# EAGLE board sevseg_driver (EAGLE 7.2.0)
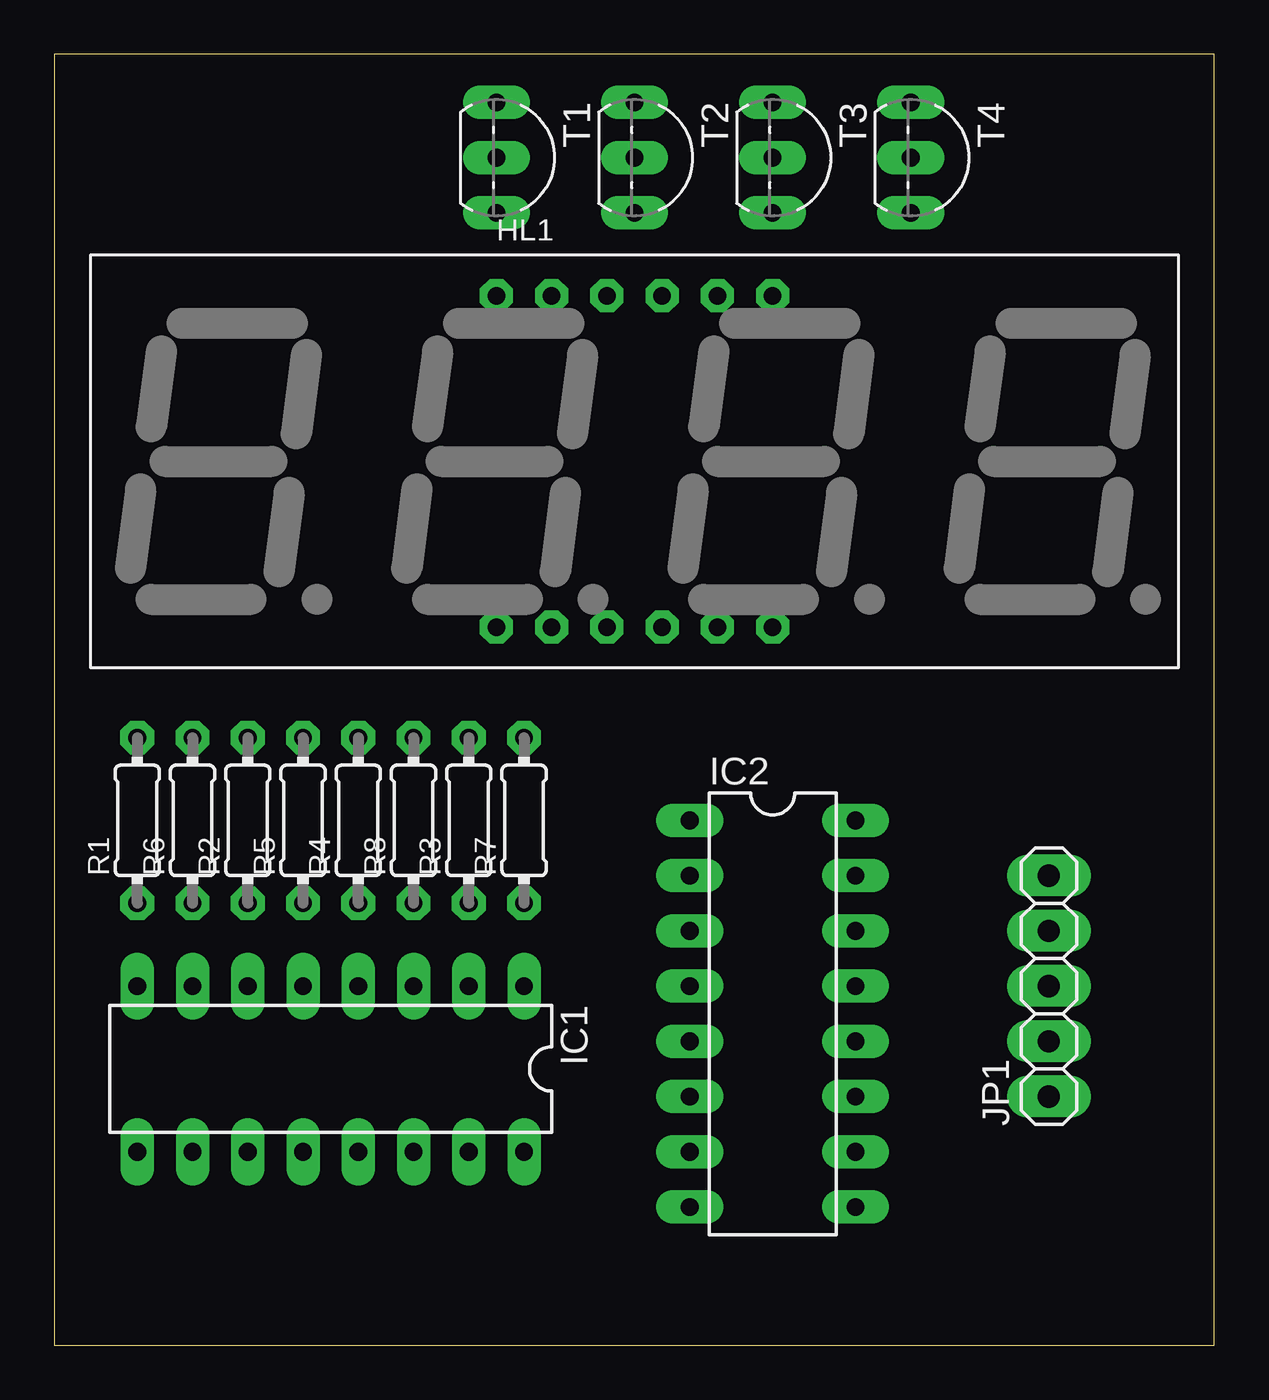
[diagram p0: board, top side]
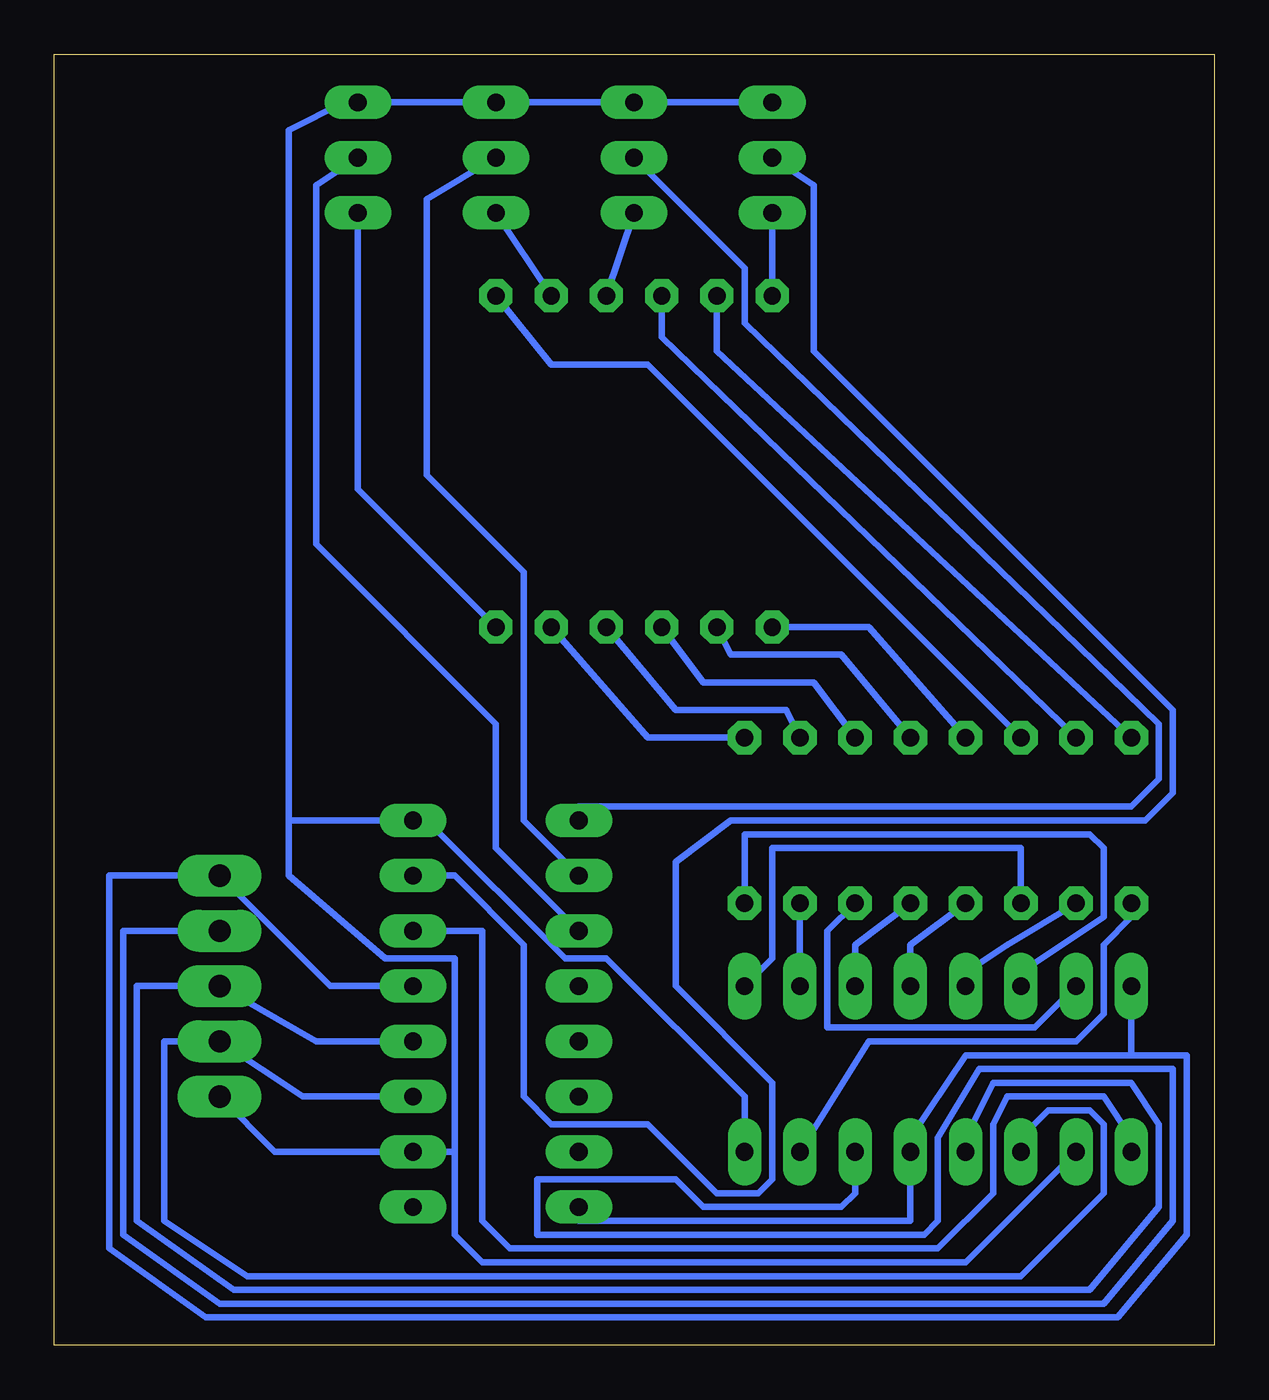
[diagram p1: board, bottom side, seen from below]

Size 53.32 x 59.36 mm. Coordinates in mm from the lower left corner, seen from the top.
Outline: 0,0 53.32,0 53.32,59.36 0,59.36 0,0
Copper layers (1*16): Top 0.035mm / dielectric 1.5mm / Bottom 0.035mm
Design rules "default *": minimum track width 10mil, minimum drill 24mil, track to track 8mil, track to pad 8mil, pad to pad 8mil, via to via 8mil, smd to smd 8mil, copper to edge 40mil, drill to drill 8mil, minimum pad ring 10mil, minimum via ring 8mil, stop-mask expansion 4mil, vias tented up to drill 0mil, thermal gap 10mil

## Footprints (pad centres in the part's own frame; a part is rotated, then mirrored left to right if it is on the bottom)
C/A-564 = drill 0.8 octagon: 1 -6.35,-7.62; 2 -3.81,-7.62; 3 -1.27,-7.62; 4 1.27,-7.62; 5 3.81,-7.62; 6 6.35,-7.62; 7 6.35,7.62; 8 3.81,7.62; 9 1.27,7.62; 10 -1.27,7.62; 11 -3.81,7.62; 12 -6.35,7.62
DIL16 = drill 0.813 long: 1 -8.89,-3.81; 2 -6.35,-3.81; 3 -3.81,-3.81; 4 -1.27,-3.81; 5 1.27,-3.81; 6 3.81,-3.81; 7 6.35,-3.81; 8 8.89,-3.81; 9 8.89,3.81; 10 6.35,3.81; 11 3.81,3.81; 12 1.27,3.81; 13 -1.27,3.81; 14 -3.81,3.81; 15 -6.35,3.81; 16 -8.89,3.81
1X05 = drill 1.016 long: 1 -5.08,0; 2 -2.54,0; 3 0,0; 4 2.54,0; 5 5.08,0
0204/7 = drill 0.813 octagon: 1 -3.81,0; 2 3.81,0
TO92-EBC = drill 0.813 long: B 0,-1.27; C -2.54,-1.27; E 2.54,-1.27

## Placement (x,y rotation side)
HL1  A-564E  [C/A-564]  26.67,40.64 0 top
IC1  74HC595N  [DIL16]  12.7,12.7 180 top
IC2  74HC595N  [DIL16]  33.02,15.24 270 top
JP1  MCU  [1X05]  45.72,16.51 90 top
R1  220  [0204/7]  3.81,24.13 90 top
R2  220  [0204/7]  8.89,24.13 90 top
R3  220  [0204/7]  19.05,24.13 90 top
R4  220  [0204/7]  13.97,24.13 90 top
R5  220  [0204/7]  11.43,24.13 90 top
R6  220  [0204/7]  6.35,24.13 90 top
R7  220  [0204/7]  21.59,24.13 90 top
R8  220  [0204/7]  16.51,24.13 90 top
T1  BC338  [TO92-EBC]  21.59,54.61 270 top
T2  BC338  [TO92-EBC]  27.94,54.61 270 top
T3  BC338  [TO92-EBC]  34.29,54.61 270 top
T4  BC338  [TO92-EBC]  40.64,54.61 270 top

## Library data of the parts
HL1 = led-seg
IC1 IC2 = 74xx-eu
JP1 = pinhead
R1-R8 = resistor
T1-T4 = transistor-npn

## Nets
GND: IC1.8 IC1.13 IC2.8 IC2.13 JP1.5
N$1: IC1.15 R1.1
N$2: HL1.3 R8.2
N$3: HL1.11 R1.2
N$4: IC1.1 R2.1
N$5: HL1.7 R2.2
N$6: HL1.4 R3.2
N$7: IC1.2 R3.1
N$8: IC1.3 R4.1
N$9: IC1.9 IC2.14
N$10: HL1.12 T1.E
N$11: HL1.9 T2.E
N$12: HL1.8 T3.E
N$13: HL1.6 T4.E
N$14: IC1.14 JP1.4
N$15: HL1.2 R4.2
N$16: HL1.1 R5.2
N$17: IC1.4 R5.1
N$18: IC1.5 R6.1
N$19: HL1.10 R6.2
N$20: HL1.5 R7.2
N$21: IC1.6 R7.1
N$22: IC1.7 R8.1
N$23: IC2.15 T1.B
N$24: IC2.1 T2.B
N$25: IC2.2 T3.B
N$26: IC2.3 T4.B
N$27: IC1.12 IC2.12 JP1.3
N$28: IC1.11 IC2.11 JP1.2
VCC: IC1.10 IC1.16 IC2.10 IC2.16 JP1.1 T1.C T2.C T3.C T4.C

## Tracks (layer width: path | path; a pad name or v marks a point on that pad's centre or on a via)
GND
  Bottom 0.305: IC2.8 29.21,5.71 13.97,5.71 IC1.13 13.97,9.53 11.43,13.34 3.81,13.34 | 3.81,13.34 IC1.8 | IC2.13 40.64,16.51 JP1.5 50.8,21.59 50.8,4.45 46.35,1.27 4.45,1.27 1.27,5.08 1.27,13.34 3.81,13.34
N$1
  Bottom 0.305: R1.1 3.81,19.68 5.08,18.41 5.08,15.24 6.35,13.97 15.88,13.97 IC1.15
N$2
  Bottom 0.305: HL1.3 23.5,30.48 18.41,30.48 R8.2
N$3
  Bottom 0.305: HL1.11 22.86,45.72 R1.2
N$4
  Bottom 0.305: R2.1 8.89,22.86 20.32,22.86 20.32,17.78 IC1.1
N$5
  Bottom 0.305: R2.2 26.04,45.09 30.48,45.09 HL1.7
N$6
  Bottom 0.305: HL1.4 24.77,29.21 19.68,29.21 R3.2
N$7
  Bottom 0.305: IC1.2 R3.1
N$8
  Bottom 0.305: R4.1 16.51,18.41 IC1.3
N$9
  Bottom 0.305: IC2.14 33.66,19.05 33.66,5.71 32.38,4.45 12.7,4.45 10.16,6.99 10.16,10.16 9.53,11.43 5.08,11.43 3.81,9.53 IC1.9
N$10
  Bottom 0.305: HL1.12 T1.E
N$11
  Bottom 0.305: HL1.9 T2.E
N$12
  Bottom 0.305: HL1.8 T3.E
N$13
  Bottom 0.305: T4.E 39.37,39.37 HL1.6
N$14
  Bottom 0.305: JP1.4 50.16,19.05 50.16,5.08 45.72,1.91 5.08,1.91 1.91,5.71 1.91,12.7 10.79,12.7 12.7,9.53 12.7,5.71 13.34,5.08 31.11,5.08 31.11,7.62 24.77,7.62 23.5,6.35 17.14,6.35 16.51,6.99 IC1.14
N$15
  Bottom 0.305: HL1.2 22.23,31.75 17.14,31.75 R4.2
N$16
  Bottom 0.305: R5.2 15.88,33.02 HL1.1
N$17
  Bottom 0.305: IC1.4 13.97,18.41 R5.1
N$18
  Bottom 0.305: IC1.5 11.43,17.14 9.53,18.41 R6.1
N$19
  Bottom 0.305: R6.2 25.4,46.35 HL1.10
N$20
  Bottom 0.305: R7.2 26.04,27.94 HL1.5
N$21
  Bottom 0.305: IC1.6 8.89,17.14 5.08,19.68 5.08,22.86 5.71,23.5 21.59,23.5 R7.1
N$22
  Bottom 0.305: R8.1 17.78,19.05 17.78,14.61 8.26,14.61 IC1.7
N$23
  Bottom 0.305: IC2.15 34.92,21.59 31.75,18.41 31.75,11.43 30.48,10.16 26.04,10.16 22.86,6.99 20.95,6.99 20.32,7.62 20.32,12.06 24.77,16.51 24.77,22.23 22.23,24.13 3.17,24.13 1.91,25.4 1.91,29.21 18.41,45.72 18.41,53.34 T1.B
N$24
  Bottom 0.305: IC2.1 29.21,24.77 3.81,24.77 2.54,26.04 2.54,28.57 21.59,46.99 21.59,49.53 T2.B
N$25
  Bottom 0.305: T3.B 36.2,52.7 36.2,40.01 31.75,35.56 31.75,24.13 IC2.2
N$26
  Bottom 0.305: T4.B 41.27,53.34 41.27,36.83 33.02,28.57 33.02,22.86 IC2.3
N$27
  Bottom 0.305: IC2.12 41.27,13.97 JP1.3 49.53,16.51 49.53,5.71 45.09,2.54 5.71,2.54 2.54,6.35 2.54,10.16 3.81,12.06 10.16,12.06 11.43,9.53 IC1.12
N$28
  Bottom 0.305: IC2.11 41.91,11.43 JP1.2 48.26,13.97 48.26,5.71 44.45,3.17 8.89,3.17 5.08,6.99 5.08,10.16 5.71,10.79 7.62,10.79 8.89,9.53 IC1.11
VCC
  Bottom 0.305: IC1.16 21.59,11.43 27.94,17.78 29.84,17.78 36.2,24.13 IC2.16 42.55,24.13 | T1.C T2.C T3.C T4.C 40.01,57.15 42.55,55.88 42.55,24.13 | IC1.10 11.43,3.81 33.66,3.81 34.92,5.08 34.92,8.89 | JP1.1 43.18,8.89 IC2.10 34.92,8.89 | 34.92,8.89 34.92,17.78 38.1,17.78 42.55,21.59 42.55,24.13